# Altium PCB Converter.PcbDoc
Units mil, origin at the board's own origin, x right, y up, seen from the top; angles counter-clockwise.
Board outline 870.03 x 1035.03 mil, 2 copper layers (Top1, Bottom2), stack 36.422 mil thick; 4 components, 28 nets, 87 pads, 58 vias.
Unrouted connection lines stored in the file: 98.
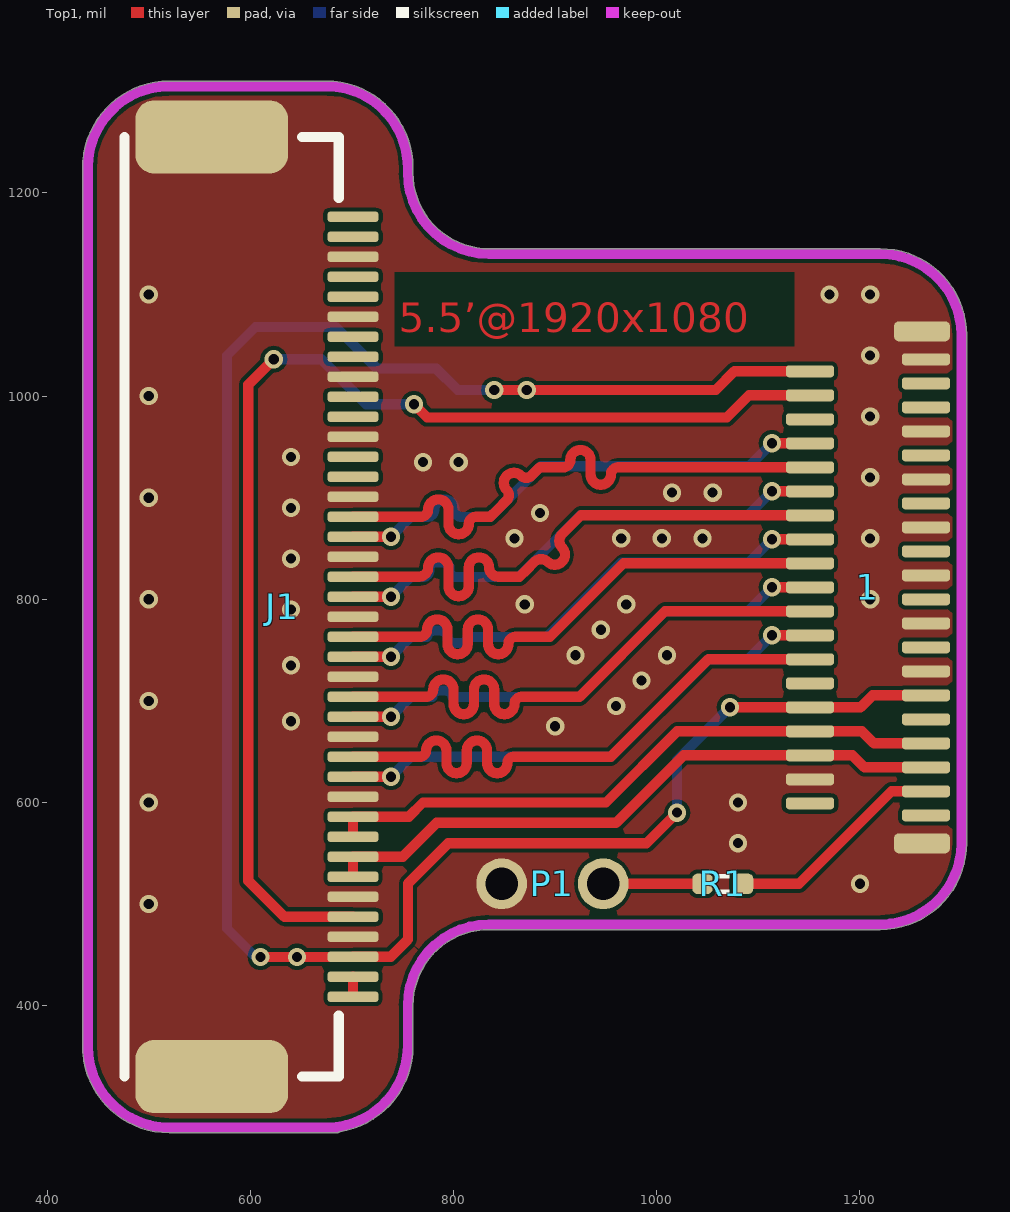
[diagram p0: Top1 view]
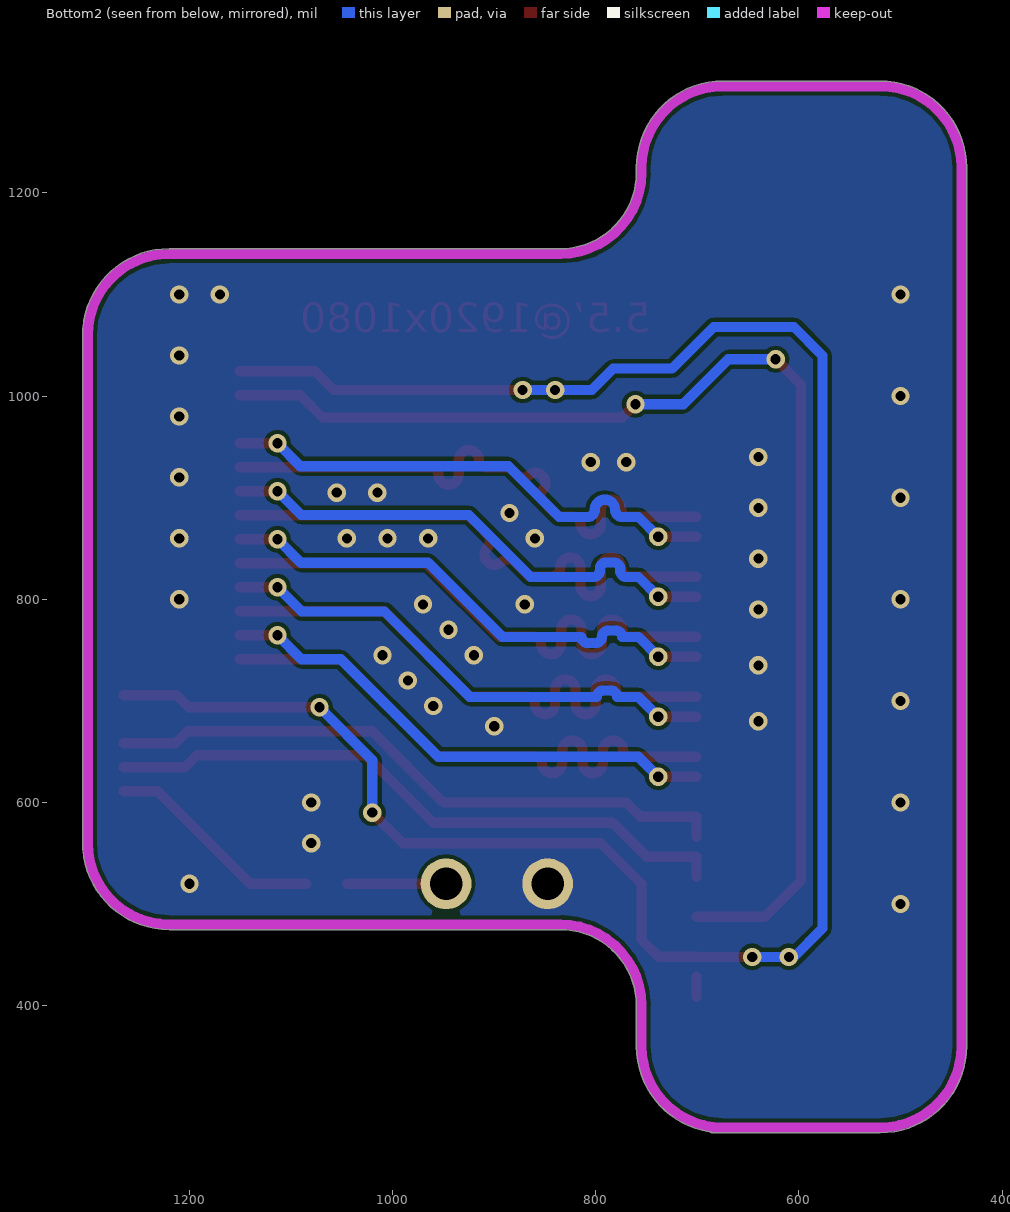
[diagram p1: Bottom2 view, seen from below]
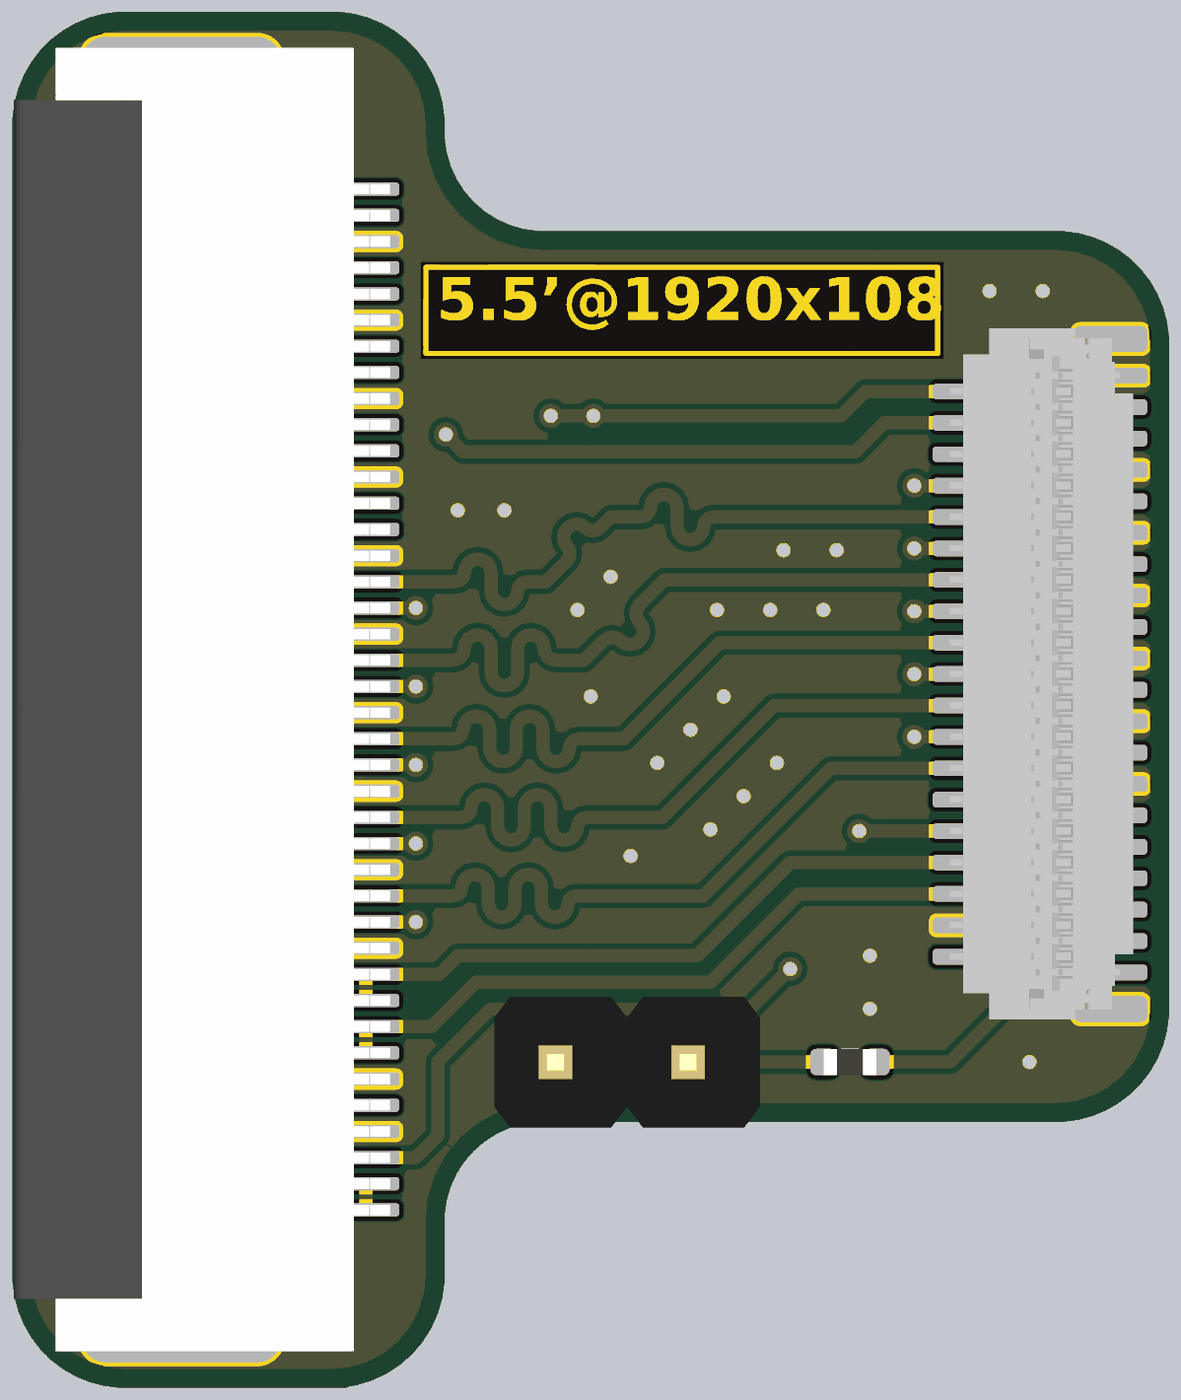
[diagram p2: 3D render of the assembled board from above, using the file's embedded part models]

## Layer stack, top to bottom
Top Solder: solder mask 0.4, Solder Resist, Dk 3.5
Top1: signal copper 1.4
Dielectric1: core 33.622, FR-4, Dk 4.2
Bottom2: signal copper 1.4
Bottom Solder: solder mask 0.4, Solder Resist, Dk 3.5

## Board outline
520,274.98 685,274.98 ccw(c685,280) 688.01,275.99 ccw(c675,360) 760.02,360 760.02,400 cw(c835,400) 835,474.98 1220,474.98 ccw(c1220,560) 1305.02,560 1305.02,1060 ccw(c1220,1060) 1220,1145.02 835,1145.02 cw(c835,1220) 760.02,1220 760.02,1225 ccw(c675,1225) 675,1310.02 ccw(c675,1305) 674.97,1310.02 520,1310.02 ccw(c520,1225) 434.99,1225 434.99,360 ccw(c520,360)

## Design rules (kind name [scope] priority, off if disabled: settings)
Clearance [All] p1: gap=4 ignorepadtopadclearanceinfootprint=FALSE except(0: Arc-Hole Track-Hole SMDPad-Hole THPad-Hole Via-Hole Fill-Hole Poly-Hole Region-Hole Text-Hole)
ComponentClearance [All] p1: gap=0 collisioncheckmode=3 verticalgap=0 showdistances=FALSE
DiffPairsRouting [All] p1: maxlimit=9 minlimit=4 mostfreqgap=4 toplayer_minwidth=4 toplayer_maxwidth=15 toplayer_prefwidth=4 bottomlayer_minwidth=4 bottomlayer_maxwidth=15 bottomlayer_prefwidth=4 maxuncoupledlength=500
FanoutControl Fanout_BGA [All] p1: bgadir=Out bgaviamode=Centered fanoutstyle=Auto fanoutdirection=Alternating viagrid=1 // Fanout_BGA (Default Rule)
HoleSize [All] p1: absolutevalues=TRUE maxlimit=10000 minlimit=8 maxpercent=80.000 minpercent=20.000
MinimumSolderMaskSliver [All] p1 off: minsoldermaskwidth=2
PlaneClearance [All] p1: clearance=8
PlaneConnect [All] p1: planeconnectstyle=Direct reliefexpansion=20 reliefentries=4 reliefconductorwidth=10 reliefairgap=10
PolygonConnect [All] p1: connectstyle=Direct reliefconductorwidth=10 reliefentries=4 polygonreliefangle="90 Angle" airgapwidth=10
RoutingVias [All] p1: holewidth=8 width=16 viastyle="Through Hole" minholewidth=6 minwidth=12 maxholewidth=28 maxwidth=50
SilkToSilkClearance [All] p1: silktosilkclearance=0
SilkToSolderMaskClearance [IsPad] p1: minsilkscreentomaskgap=0 clearancetoexposedcopper=TRUE
SolderMaskExpansion [All] p1: expansion=3
Width GND [(InNet('AGND') OR InNet('GND'))] p1: maxlimit=50 minlimit=4 preferedwidth=10
Width VCC [(InNet('VDD_SYS_3.3V') OR InNet('VDD_AV_3.3V') OR InNet('VDD_5V') OR InNet('VDD1V2-SYS') OR InNet('VDD1V1-EPHY') OR InNet('VDD-CPUX') OR InNet('NetC15_2') OR InNet('NetC9_2') OR InNet('NetC12_2'))] p2: maxlimit=50 minlimit=4 preferedwidth=10
Width [All] p3: maxlimit=10000 minlimit=4 preferedwidth=4
21 further rules are at their usual default settings.

## Classes and differential pairs
net class MIPI: MIPI1_D0N MIPI1_D0P MIPI1_D1N MIPI1_D1P MIPI1_D2N MIPI1_D2P MIPI1_D3N MIPI1_D3P MIPI1_DCN MIPI1_DCP

## Components (designator, comment, footprint, x,y, rotation, side; value= is the part's Value field where it differs from the comment)
1 "FH26-39S-0.3SHW" FH26-39S-0.3SHW 1150.83,811.81 r90 top
J1 "0.5S_A_40PWB" FFC_0.5_40 641,792.64 r270 top
P1 "DIP 1x2" HDR1X2_2.54_180 847.35,520 r90 top value=2.54
R1 "200R" RES_0402 1065,520 r180 top value=22R

## Footprints (in the part's own frame and the unit in brackets; to place one, negate y for a bottom-side part, rotate by r counter-clockwise, add the part's x,y. Pads: shape width x height; smd on the part's side, far side on the other; paste and mask are expansions set on the pad)
FFC_0.5_40 [mil]
  rrect50% 72x150 smd: 0(-462.48,-78.98) 0(462.48,-78.98)
  rrect50% 10x50 smd: 1(-383.86,60) 2(-364.17,60) 3(-344.49,60) 4(-324.8,60) 5(-305.12,60) 6(-285.43,60) 7(-265.75,60) 8(-246.06,60) 9(-226.38,60) 10(-206.69,60) 11(-187.01,60) 12(-167.32,60) 13(-147.64,60) 14(-127.95,60) 15(-108.27,60) 16(-88.58,60) 17(-68.9,60) 18(-49.21,60) 19(-29.53,60) 20(-9.84,60) 21(9.84,60) 22(29.53,60) 23(49.21,60) 24(68.9,60) 25(88.58,60) 26(108.27,60) 27(127.95,60) 28(147.64,60) 29(167.32,60) 30(187.01,60) 31(206.69,60) 32(226.38,60) 33(246.06,60) 34(265.75,60) 35(285.43,60) 36(305.12,60) 37(324.8,60) 38(344.49,60) 39(364.17,60) 40(383.86,60)
  silkscreen extent -462,-165 462,46, body extent -490,-205 490,78, height 99
FH26-39S-0.3SHW [mm]
  rrect50% 0.3x1.2 smd: 1(5.7,-2.9) 2(5.4,0) 3(5.1,-2.9) 4(4.8,0) 5(4.5,-2.9) 6(4.2,0) 7(3.9,-2.9) 8(3.6,0) 9(3.3,-2.9) 10(3,0) 11(2.7,-2.9) 12(2.4,0) 13(2.1,-2.9) 14(1.8,0) 15(1.5,-2.9) 16(1.2,0) 17(0.9,-2.9) 18(0.6,0) 19(0.3,-2.9) 20(0,0) 21(-0.3,-2.9) 22(-0.6,0) 23(-0.9,-2.9) 24(-1.2,0) 25(-1.5,-2.9) 26(-1.8,0) 27(-2.1,-2.9) 28(-2.4,0) 29(-2.7,-2.9) 30(-3,0) 31(-3.3,-2.9) 32(-3.6,0) 33(-3.9,-2.9) 34(-4.2,0) 35(-4.5,-2.9) 36(-4.8,0) 37(-5.1,-2.9) 38(-5.4,0) 39(-5.7,-2.9)
  rrect50% 0.5x1.4 smd: GND1(6.4,-2.8) GND2(-6.4,-2.8)
  body extent -6.6,-3.23 6.6,0.27, height 0.98
HDR1X2_2.54_180 [mil]
  round 50 hole 32: 1(0,0) 2(0,-100)
  body extent -49,-150 49,50, height 323
RES_0402 [mil]
  rrect50% 20x20 smd: 1(-20,0) 2(20,0)
  silkscreen extent -7,-10 7,10, body extent -20,-10 20,10, height 14

## Part data
1: "39 Position FPC Connector Contacts, Bottom 0.012 _0.30mm_ Surface Mount, Right Angle", Package=None, Availability=Unavailable, MF=Hirose, MP=FH26-39S-0.3SHW, Price=None, SnapEDA_Link=https://www.snapeda.com/parts/FH26-39S-0.3SHW/Hirose/view-part/44187/?ref=snap
J1: library part FPC40-0.5mm, "Header, 40-Pin", LatestRevisionDate=17-Jul-2002, LatestRevisionNote="Re-released for DXP Platform.", Publisher="Altium Limited"
P1: library part HDR1x2_2.54, "Header", Type="DIP 1x2"
R1: library part 电阻-0402, "Resistor"

## Via types
v1: diameter 18, hole 10, Top1 to Bottom2, tented both sides, 58 vias

## Nets (pads, with @x,y where several pads share a name; then routed paths per layer and width w, separated by ;. In a path a pad name is that pad's centre, name@x,y a point inside that pad or via, vN(x,y) a via of type N, cw(c..) or ccw(c..) an arc to the next point about the centre after c; other vN are vias at no path point)
GND: 1.1 1.7 1.11 1.15 1.19 1.23 1.27 1.31 1.36 1.GND1 1.GND2 J1.0 J1.3 J1.6 J1.9 J1.12 J1.15 J1.18 J1.21 J1.24 J1.27 J1.30 J1.35 J1.37 P1.1
  other v1: 500,500 1200,520 1080,560 500,600 1080,600 900,675 640,680 960,695 500,700 985,720 640,735 920,745 1010,745 945,770 640,790 870,795 970,795 500,800 1210,800 640,840 860,860 965,860 1005,860 1045,860 1210,860 885,885 640,890 500,900 1015,905 1055,905 1210,920 770,935 805,935 640,940 1210,980 500,1000 1210,1040 500,1100 1170,1100 1210,1100
MIPI0_D0N: J1.13
MIPI0_D0P: J1.14
MIPI0_D1N: J1.10
MIPI0_D1P: J1.11
MIPI0_D2N: J1.4
MIPI0_D2P: J1.5
MIPI0_D3N: J1.1
MIPI0_D3P: J1.2
MIPI0_DCN: J1.7
MIPI0_DCP: J1.8
MIPI1_D0N: 1.26 J1.28 | length 579
  Top1 w10: J1.28 763,645 766.87,645 ccw(c766.87,651.13) 773,651.13 cw(c783,651.13) 783,661.13 cw(c783,651.13) 793,651.13 793,645 793,638.87 ccw(c803,638.87) 803,628.87 ccw(c803,638.87) 813,638.87 813,645 813,651.13 cw(c823,651.13) 823,661.13 cw(c823,651.13) 833,651.13 833,645 833,638.87 ccw(c843,638.87) 843,628.87 ccw(c843,638.87) 853,638.87 cw(c859.13,638.87) 859.13,645 871,645 954.84,645 1050.79,740.94 1.26
MIPI1_D0P: 1.24 J1.29 | length 507.5
  Top1 w10: J1.29 v1(738.47,625.32) ; v1(1113.36,764.57) 1.24
  Bottom2 w10: v1(738.47,625.32) 758.15,645 955,645 1051,741 1089.79,741 v1(1113.36,764.57)
MIPI1_D1N: 1.22 J1.25 | length 581.3
  Top1 w10: J1.25 770,704.06 772.87,704.06 ccw(c772.87,711.19) 780,711.19 cw(c790,711.19) 790,721.19 cw(c790,711.19) 800,711.19 800,704.06 800,696.92 ccw(c810,696.92) 810,686.92 ccw(c810,696.92) 820,696.92 820,704.06 820,711.19 cw(c830,711.19) 830,721.19 cw(c830,711.19) 840,711.19 840,704.06 840,696.92 ccw(c850,696.92) 850,686.92 ccw(c850,696.92) 860,696.92 cw(c867.13,696.92) 867.13,704.06 878,704.06 924.06,704.06 1008.19,788.19 1.22
MIPI1_D1P: 1.20 J1.26 | length 509.6
  Top1 w10: J1.26 v1(738.47,684.37) ; v1(1113.36,811.81) 1.20
  Bottom2 w10: v1(738.47,684.37) 758.1,704 769,704 779,704 cw(c785.13,704) 785.13,710.13 792.87,710.13 cw(c792.87,704) 799,704 818,704 924,704 1008,788 1089.55,788 v1(1113.36,811.81)
MIPI1_D2N: 1.14 J1.19 | length 577.9
  Top1 w10: J1.19 765,822.16 765.87,822.16 ccw(c765.87,831.3) 775,831.3 cw(c785,831.3) 785,841.3 cw(c785,831.3) 795,831.3 795,822.16 795,813.03 ccw(c805,813.03) 805,803.03 ccw(c805,813.03) 815,813.03 815,822.16 815,831.3 cw(c825,831.3) 825,841.3 cw(c825,831.3) 835,831.3 ccw(c844.13,831.3) 844.13,822.16 855,822.16 864.91,822.16 871.98,829.24 879.67,836.92 cw(c886.12,830.46) 892.58,836.92 ccw(c899.65,843.99) 906.72,836.92 ccw(c899.65,843.99) 906.72,851.06 cw(c913.18,857.52) 906.72,863.98 912.87,870.13 925.42,882.68 1.14
MIPI1_D2P: 1.12 J1.20 | length 510.8
  Top1 w10: J1.20 v1(738.47,802.48) ; v1(1113.36,906.3) 1.12
  Bottom2 w10: v1(738.47,802.48) 757.99,822 766,822 770,822 ccw(c770,828) 776,828 776,830.13 cw(c782,830.13) 782,836.13 790,836.13 cw(c790,830.13) 796,830.13 796,828 ccw(c802,828) 802,822 813,822 864,822 925,883 1090.06,883 v1(1113.36,906.3)
MIPI1_D3N: 1.10 J1.16 | length 580
  Top1 w10: J1.16 765,881.22 767.87,881.22 ccw(c767.87,888.35) 775,888.35 cw(c785,888.35) 785,898.35 cw(c785,888.35) 795,888.35 795,881.22 795,874.09 ccw(c805,874.09) 805,864.09 ccw(c805,874.09) 815,874.09 cw(c822.13,874.09) 822.13,881.22 835,881.22 836.22,881.22 843.29,888.29 852.39,897.39 ccw(c847.35,902.43) 852.39,907.48 cw(c859.46,914.55) 852.39,921.62 cw(c859.46,914.55) 866.53,921.62 ccw(c871.58,926.66) 876.62,921.62 884.92,929.92 894.92,929.92 907.79,929.92 ccw(c907.79,937.05) 914.92,937.05 cw(c924.92,937.05) 924.92,947.05 cw(c924.92,937.05) 934.92,937.05 934.92,929.92 934.92,922.79 ccw(c944.92,922.79) 944.92,912.79 ccw(c944.92,922.79) 954.92,922.79 cw(c962.05,922.79) 962.05,929.92 971,929.92 1.10
MIPI1_D3P: 1.8 J1.17 | length 507.5
  Top1 w10: J1.17 v1(738.47,861.53) ; v1(1113.36,953.54) 1.8
  Bottom2 w10: v1(738.47,861.53) 757.93,881 771,881 773.87,881 ccw(c773.87,888.13) 781,888.13 cw(c791,888.13) 791,898.13 cw(c791,888.13) 801,888.13 ccw(c808.13,888.13) 808.13,881 816,881 836,881 886,931 1090.82,931 v1(1113.36,953.54)
MIPI1_DCN: 1.18 J1.22 | length 576.4
  Top1 w10: J1.22 764,763.11 766.87,763.11 ccw(c766.87,770.24) 774,770.24 cw(c784,770.24) 784,780.24 cw(c784,770.24) 794,770.24 794,763.11 794,755.98 ccw(c804,755.98) 804,745.98 ccw(c804,755.98) 814,755.98 814,763.11 814,770.24 cw(c824,770.24) 824,780.24 cw(c824,770.24) 834,770.24 834,763.11 834,755.98 ccw(c844,755.98) 844,745.98 ccw(c844,755.98) 854,755.98 cw(c861.13,755.98) 861.13,763.11 871,763.11 894.92,763.11 967.24,835.43 1.18
MIPI1_DCP: 1.16 J1.23 | length 511.7
  Top1 w10: J1.23 v1(738.47,743.43) ; v1(1113.36,859.06) 1.16
  Bottom2 w10: v1(738.47,743.43) 758.04,763 764,763 774,763 cw(c780.13,763) 780.13,769.13 787.87,769.13 cw(c787.87,763) 794,763 ccw(c800.13,763) 800.13,756.87 807.87,756.87 ccw(c807.87,763) 814,763 821,763 892,763 965,836 1090.31,836 v1(1113.36,859.06)
Net1_37: 1.37 R1.1 | length 217.7
  Top1 w10: R1.1 1140,520 1231.02,611.02 1.37
NetP1_2: P1.2 R1.2 | length 97.7
  Top1 w10: P1.2 R1.2
RST: 1.4 J1.36 | length 1201.8
  Top1 w10: v1(623,1036.22) 598,1011.22 598,523 633.48,487.52 J1.36 ; v1(761,992) 774,979 1069.02,979 1090.81,1000.79 1.4
  Bottom2 w10: v1(623,1036.22) 669.78,1036.22 714,992 v1(761,992)
VCC_3V3: 1.2 1.29 1.30 J1.38 | length 2119.5
  Top1 w10: v1(610,448) v1(646,448) 700.85,448 J1.38 738.15,448.15 755,465 755,520 794.84,559.84 989.84,559.84 v1(1020,590) ; v1(840,1006) v1(872,1006) 1058,1006 1076.41,1024.41 1.2 ; v1(1072,693.7) 1.30 1200.7,693.7 1212.51,705.51 1.29
  Bottom2 w10: v1(646,448) v1(610,448) 605,448 577,476 577,1040 605,1068 684,1068 725,1027 783,1027 804,1006 v1(840,1006) v1(872,1006) ; v1(1020,590) 1020,641.7 v1(1072,693.7)
VCC_5V: J1.39 J1.40 | length 19.7
  Top1 w10: J1.40 J1.39
VLED+: 1.32 1.33 J1.31 J1.32 | length 623.4
  Top1 w10: J1.32 J1.31 755.95,585.94 770,600 950,600 1020.08,670.08 1.32 1201.92,670.08 1213.73,658.27 1.33
VLED-: 1.34 1.35 J1.33 J1.34 | length 629.9
  Top1 w10: J1.34 J1.33 750,546.57 783.43,580 960,580 1026.46,646.46 1.34 1192.54,646.46 1204.35,634.65 1.35
pads on no net: 1.3 1.5 1.6 1.9 1.13 1.17 1.21 1.25 1.28 1.38 1.39

## Polygon pours and split planes (outlines as drawn)
GND on Top1 (solid, remove dead copper, pour order 5): 350,1350 1350,1350 1350,250 350,250
GND on Bottom2 (solid, remove dead copper, pour order 7): 350,1350 1350,1350 1350,250 350,250

## Keep-outs
Keep-Out Layer:
  lines w10: 675,280 ccw(c675,360) 755,360 755,400 cw(c835,400) 835,480 1220,480 ccw(c1220,560) 1300,560 1300,1060 ccw(c1220,1060) 1220,1140 835,1140 cw(c835,1220) 755,1220 755,1225 ccw(c675,1225) 675,1305 520,1305 ccw(c520,1225) 440,1225 440,360 ccw(c520,360) 520,280 685,280

## Other copper
Top1:
  text "5.5’@1920x1080" at 746,1053 h50

## Silkscreen, mask and mechanical layers (free items; w line width, h text height)
Top Solder:
  region: 742,1121.79 742,1049 1135.13,1049 1135.13,1121.79